# Altium PCB PCB1.PcbDoc (part 3 of 4)
Units mil, origin at the board's own origin, x right, y up, seen from the top; angles counter-clockwise.
Board outline 5315 x 3730 mil, 2 copper layers (Top Layer, Bottom Layer); 713 components, 554 nets, 2458 pads, 0 vias.
Unrouted connection lines stored in the file: 1728.
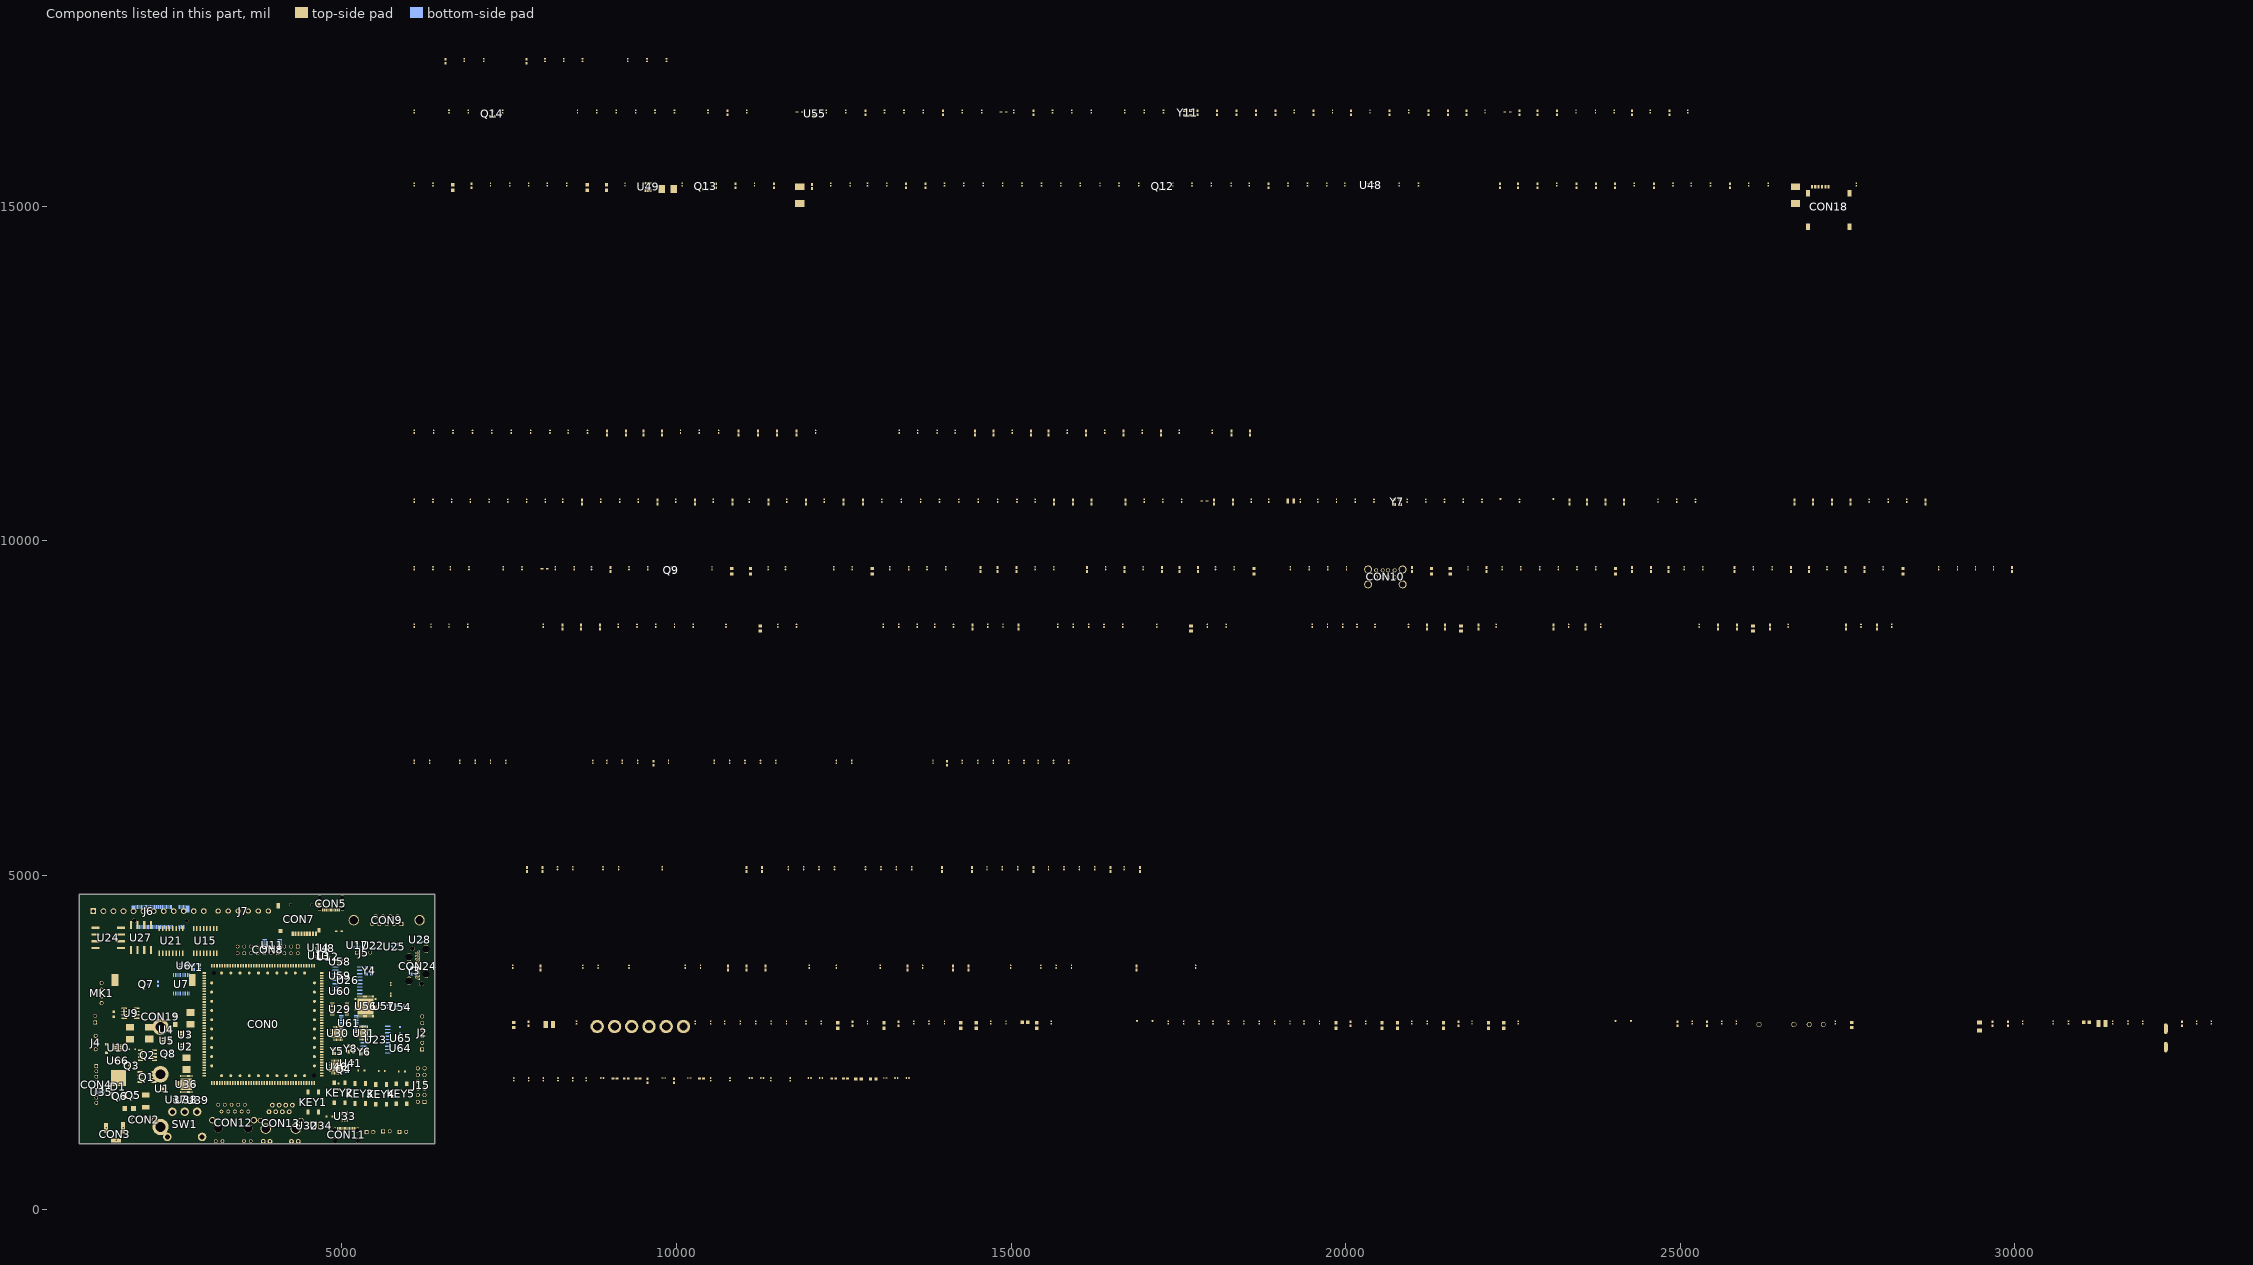
[diagram p2: the components of this part, seen from the top]

## Part data (continued)
R30 R34 R35 R41 R78 R79 R80 R81 R82 R83 R99 R111 R139 R140 R141 R142 R145 R152 R154 R155 R156 R159 R193 R313 R316: library part Resistor_Dup3, "贴片电阻,10K,±1%,1/16W", Manufacturer Character=中国大陆, Operation Temperature（℃）=-55~155℃, Temperature=–55~155℃, CLASS=DISCRETE, PCB Footprint=R0402
  R30 R34 R35 R41 R193 R313 R316: As-Welded=/
  R78 R79 R80 R81 R82 R83: As-Welded=DNP
  R99 R111: As-Welded=/, room=6
  R139 R140 R141 R142 R145 R152 R154 R155 R156 R159: As-Welded=/, room="USB HUB"
R32 R37 R39 R77 R86 R87 R88 R89 R90 R91 R92 R93 R94 R194 R279 R281 R284 R287 R288 R296 R307 R310 R311 R312 R392 R446: library part Resistor_Dup3, "贴片电阻,10K,±1%,1/16W", Manufacturer Character=中国大陆, Operation Temperature（℃）=-55~155℃, CLASS=DISCRETE, PCB Footprint=R0402
  R32 R37 R39 R446: As-Welded=/, Temperature=-55~155℃
  R77 R86 R87 R88 R89 R90 R91 R92 R93 R94: As-Welded=/, room=485-5, Temperature=-55~155℃
  R194 R392: As-Welded=/
  R279 R284 R287 R288 R296 R307 R310 R311 R312: As-Welded=/, room="USB HUB"
  R281: As-Welded=DNP, Temperature=-55~155℃
R33: library part Resistor_Dup3, "贴片电阻,68K,±1%,1/16W", Manufacturer Character=中国大陆, Operation Temperature（℃）=-55~155℃, As-Welded=/, CLASS=DISCRETE, PCB Footprint=R0402, Temperature=-55~155℃
R42: library part Resistor_Dup3, "28K,±1%,R0402,≥1/16W", Manufacturer Character=中国大陆, Operation Temperature（℃）=-40~85℃, Temperature=-55~155℃, As-Welded=/, CLASS=DISCRETE, PCB Footprint=R0402
R45 R138 R153 R393: library part Resistor_Dup3, "贴片电阻,1M,±1%,1/10W", Manufacturer Character=中国大陆, Operation Temperature（℃）=-55~155℃, As-Welded=/, CLASS=DISCRETE, PCB Footprint=R0603
  R45 R138 R153: room="USB HUB"
R46 R48 R55 R61: library part Resistor_Dup2, "贴片电阻,100R,±1%,1/10W", Manufacturer Character=中国大陆, Operation Temperature（℃）=-55~155℃, As-Welded=/, CLASS=DISCRETE, PCB Footprint=R0603, Temperature=-55~155℃
  R46 R48: room=JTAG
R47 R49 R50 R52 R72 R84 R100 R106 R112 R116 R163: library part Resistor_Dup3, "贴片电阻,1K,±1%,1/16W", Manufacturer Character=中国大陆, Operation Temperature（℃）=-55~155℃, As-Welded=/, CLASS=DISCRETE, PCB Footprint=R0402
  R72: room=EEPROM/RTC
  R84: room=JTAG_DSP
  R100 R106 R112 R116: room=6
R54: library part Resistor_Dup2, "贴片电阻,22R,±1%,1/16W", Manufacturer Character=中国大陆, Operation Temperature（℃）=-55~155℃, As-Welded=/, CLASS=DISCRETE, PCB Footprint=R0402, room=JTAG, Temperature=-55~155℃
R57: library part Resistor_Dup2, "贴片电阻,10K,±1%,1/16W", Manufacturer Character=中国大陆, Operation Temperature（℃）=-55~155℃, Temperature=-55~125℃, As-Welded=/, CLASS=DISCRETE, PCB Footprint=R0402, room=KEY
R64 R65: library part Resistor_Dup3, "贴片电阻,5.1K,±1%,1/16W", Manufacturer Character=中国大陆, Operation Temperature（℃）=-55~155℃, Temperature=-55~125℃, As-Welded=/, CLASS=DISCRETE, PCB Footprint=R0402, room=JTAG
R95: library part Resistor_Dup3, "贴片电阻,4.7K,±1%,1/16W", Manufacturer Character=中国大陆, Mfr_name=PANASONIC-ECG, Mfr_part_number=ERJ-2RNF6981V, Mistral Part No=110009031036-R, Operation Temperature（℃）=-55~155℃, Package=0402, Tolerance=1%, As-Welded=/, Chkd/date=SHREESHAIL/100807, CLASS=DISCRETE, Crtd /date=MAZHAR/090807, Custom_Duty=15%, Customs_HS_Code=85332119, Datasheet=Y:\MIS_DATABASE\DATASHEETS\RESISTORS\PAN_ERJ.PDF, Distributor_name=NA, Distributor_part_number=NA, Height=0.40MM, Part_type=RESISTORS\FIXED, PCB Footprint=R0402, Project="TELEMETRY ENCODER", Wattage=1/16W
R96: library part Resistor_Dup3, "贴片电阻,1K,±1%,1/16W", Manufacturer Character=中国大陆, Mfr_name=PANASONIC-ECG, Mfr_part_number=ERJ-2RNF6981V, Mistral Part No=110009031036-R, Operation Temperature（℃）=-55~155℃, Package=0402, Tolerance=1%, As-Welded=/, Chkd/date=SHREESHAIL/100807, CLASS=DISCRETE, Crtd /date=MAZHAR/090807, Custom_Duty=15%, Customs_HS_Code=85332119, Datasheet=Y:\MIS_DATABASE\DATASHEETS\RESISTORS\PAN_ERJ.PDF, Distributor_name=NA, Distributor_part_number=NA, Height=0.40MM, Part_type=RESISTORS\FIXED, PCB Footprint=R0402, Project="TELEMETRY ENCODER", Wattage=1/16W
R97: library part Resistor_Dup3, "贴片电阻,10K,±1%,1/16W", Manufacturer Character=中国大陆, Mfr_name=PANASONIC-ECG, Mfr_part_number=ERJ-2RNF6981V, Mistral Part No=110009031036-R, Operation Temperature（℃）=-55~155℃, Package=0402, Tolerance=1%, As-Welded=/, Chkd/date=SHREESHAIL/100807, CLASS=DISCRETE, Crtd /date=MAZHAR/090807, Custom_Duty=15%, Customs_HS_Code=85332119, Datasheet=Y:\MIS_DATABASE\DATASHEETS\RESISTORS\PAN_ERJ.PDF, Distributor_name=NA, Distributor_part_number=NA, Height=0.40MM, Part_type=RESISTORS\FIXED, PCB Footprint=R0402, Project="TELEMETRY ENCODER", Wattage=1/16W
R98: library part Resistor_Dup3, "贴片电阻,20K,±1%,1/16W", Manufacturer Character=中国大陆, Mfr_name=PANASONIC-ECG, Mfr_part_number=ERJ-2RNF6981V, Mistral Part No=110009031036-R, Operation Temperature（℃）=-55~155℃, Package=0402, Tolerance=1%, As-Welded=/, Chkd/date=SHREESHAIL/100807, CLASS=DISCRETE, Crtd /date=MAZHAR/090807, Custom_Duty=15%, Customs_HS_Code=85332119, Datasheet=Y:\MIS_DATABASE\DATASHEETS\RESISTORS\PAN_ERJ.PDF, Distributor_name=NA, Distributor_part_number=NA, Height=0.40MM, Part_type=RESISTORS\FIXED, PCB Footprint=R0402, Project="TELEMETRY ENCODER", Wattage=1/16W
R101 R113: library part Resistor_Dup3, "贴片电阻,120R,±1%,1/8W", Manufacturer Character=中国大陆, Operation Temperature（℃）=-55~155℃, Temperature=-55~125℃, As-Welded=/, CLASS=DISCRETE, PCB Footprint=R0805, room=6
R102 R104 R114 R115: library part Resistor_Dup3, "贴片电阻,10R,±1%,1/10W", Manufacturer Character=中国大陆, Operation Temperature（℃）=-55~155℃, Temperature=–55~155℃, As-Welded=/, CLASS=DISCRETE, PCB Footprint=R0603, room=6
R117 R118 R125 R126 R161 R162: library part "R 1%", "贴片电阻,10K,±1%,1/16W", Manufacturer Character=中国大陆, Operation Temperature（℃）=-55~155℃, Temperature=–55~155℃, As-Welded=/, Characteristic="0402 1/16W +/-1%", CLASS=DISCRETE, PCB Footprint=R0402
  R161 R162: room=DRDUSB
R119 R120 R123 R124 R127 R128 R131 R132: library part "R 1%", "贴片电阻,22R,±1%,1/16W", Manufacturer Character=中国大陆, Operation Temperature（℃）=-55~155℃, As-Welded=/, Characteristic="0402 1/16W +/-1%", CLASS=DISCRETE, PCB Footprint=R0402, Temperature=-55~155℃
R121 R129: library part "R 1%", "贴片电阻,120R,±1%,1/8W", Manufacturer Character=中国大陆, Operation Temperature（℃）=-55~155℃, Temperature=-55~125℃, As-Welded=/, Characteristic="0402 1/16W +/-1%", CLASS=DISCRETE, PCB Footprint=R0805
R122 R130: library part "R 1%", "贴片电阻,33R,±1%,1/16W", Manufacturer Character=中国大陆, Operation Temperature（℃）=-55~155℃, As-Welded=/, Characteristic="0402 1/16W +/-1%", CLASS=DISCRETE, PCB Footprint=R0402, Temperature=-55~155℃
R136 R150 R295: library part Resistor_Dup3, "贴片电阻,0R,±1%,1/10W", Manufacturer Character=中国大陆, Operation Temperature（℃）=-55~155℃, CLASS=DISCRETE, PCB Footprint=R0603
  R136 R150: As-Welded=DNP
  R295: As-Welded=/
R137 R151: library part Resistor_Dup3, "0R,±1%,R0603,≥1/10W", Manufacturer Character=中国大陆, Operation Temperature（℃）=-55~155℃, Temperature=–55~155℃, As-Welded=/, CLASS=DISCRETE, PCB Footprint=R0603
R143 R157: library part Resistor_Dup3, "贴片电阻,680R,±1%,1/10W", Manufacturer Character=中国大陆, Operation Temperature（℃）=-55~155℃, As-Welded=DNP, CLASS=DISCRETE, PCB Footprint=R0603, room="USB HUB", Temperature=-55~155℃
R164: library part "R 1%", "贴片电阻,51K,±1%,1/16W", Manufacturer Character=中国大陆, Mfr_name=PANASONIC-ECG, Mfr_part_number=ERJ-2RNF6981V, Mistral Part No=110009031036-R, Operation Temperature（℃）=-55~155℃, Package=0402, Tolerance=1%, As-Welded=/, Characteristic="0402 1/16W +/-1%", CLASS=DISCRETE, Crtd /date=MAZHAR/090807, Custom_Duty=15%, Customs_HS_Code=85332119, Datasheet=Y:\MIS_DATABASE\DATASHEETS\RESISTORS\PAN_ERJ.PDF, Distributor_name=NA, Distributor_part_number=NA, Height=0.40MM, Part_type=RESISTORS\FIXED, PCB Footprint=R0402, Project="TELEMETRY ENCODER", Temperature=-55~155℃
R166: library part "R 1%", "贴片电阻,100K,±1%,1/16W", Manufacturer Character=中国大陆, Operation Temperature（℃）=-55~155℃, As-Welded=/, Characteristic="0402 1/16W +/-1%", CLASS=DISCRETE, PCB Footprint=R0402, room="USB HUB", Temperature=-55~155℃
R167: library part "R 1%", "贴片电阻,15K,±1%,1/16W", Manufacturer Character=中国大陆, Operation Temperature（℃）=-55~155℃, Temperature=-55~125℃, As-Welded=DNP, Characteristic="0402 1/16W +/-1%", CLASS=DISCRETE, PCB Footprint=R0402, room=DRDUSB
R168: library part 10_R_0, "0R,±1%,R0402,≥1/16W", Manufacturer Character=中国大陆, Operation Temperature（℃）=-55~155℃, As-Welded=/, CLASS=DISCRETE, PCB Footprint=R0402, room=ecat1, Temperature=-55~155℃
R169: library part "R 1%", "贴片电阻,100K,±1%,1/16W", Manufacturer Character=中国大陆, Operation Temperature（℃）=-55~155℃, Temperature=-55~125℃, As-Welded=/, Characteristic="0402 1/16W +/-1%", CLASS=DISCRETE, PCB Footprint=R0402, room=DRDUSB
R170 R172: library part "R 1%", "0R,±1%,R0402,≥1/16W", Manufacturer Character=中国大陆, Operation Temperature（℃）=-55~155℃, Temperature=-55~125℃, As-Welded=/, Characteristic="0402 1/16W +/-1%", CLASS=DISCRETE, PCB Footprint=R0402, room="USB HUB"
R171: library part "R 1%", "贴片电阻,10K,±1%,1/16W", Manufacturer Character=中国大陆, Operation Temperature（℃）=-55~155℃, Temperature=-55~125℃, As-Welded=/, Characteristic="0402 1/16W +/-1%", CLASS=DISCRETE, PCB Footprint=R0402, room="USB HUB"
R174 R285 R291 R292 R293 R294 R297 R298 R302 R303 R304 R305 R306 R444: library part Resistor_Dup3, "贴片电阻,0R,±1%,1/16W", Manufacturer Character=中国大陆, Operation Temperature（℃）=-55~155℃, CLASS=DISCRETE, PCB Footprint=R0402
  R174 R293: As-Welded=DNP
  R285 R291 R292 R294 R304 R306 R444: As-Welded=/
  R297 R298 R302 R303 R305: As-Welded=/, room="USB HUB"
R175 R176 R177 R178 R181 R182 R183 R184: library part Resistor_Dup3, "37.4R,±1%,R0603,≥1/10W", Manufacturer Character=中国大陆, Operation Temperature（℃）=-40~85℃, As-Welded=DNP, CLASS=DISCRETE, PCB Footprint=R0603
R180 R186: library part Resistor_Dup3, "贴片电阻,330R,±1%,1/16W", Manufacturer Character=中国大陆, Operation Temperature（℃）=-55~155℃, As-Welded=/, CLASS=DISCRETE, PCB Footprint=R0402
R192: library part Resistor_Dup3, "贴片电阻,2.49K,±1%,1/10W", Manufacturer Character=中国大陆, Operation Temperature（℃）=-55~155℃, As-Welded=/, CLASS=DISCRETE, PCB Footprint=R0603
R195 R196 R197 R204 R208 R209: library part Resistor_Dup3, "0R,±1%,R0603,≥1/10W", Manufacturer Character=中国大陆, Operation Temperature（℃）=-55~155℃, As-Welded=/, CLASS=DISCRETE, PCB Footprint=R0603, room=RS232
R219: library part R_1, "贴片电阻,2.49K,±1%,1/10W", Manufacturer Character=中国大陆, Operation Temperature（℃）=-55~155℃, As-Welded=/, PCB Footprint=R0603, room="USB HUB"

## Text inside footprints (layer, text, board x,y; h text height)
C262: Top Overlay "+" at 11740,15335 h40 r90
CON0: Top Overlay "160" at 2836.1,1992.28 h25; Top Overlay "1" at 3051.1,1827.28 h25; Top Overlay "40" at 4566.1,1822.28 h25; Top Overlay "41" at 4746.1,1992.28 h25; Top Overlay "80" at 4746.1,3527.28 h25; Top Overlay "81" at 4576.1,3692.28 h25; Top Overlay "120" at 3016.1,3697.28 h25; Top Overlay "121" at 2836.1,3527.28 h25; Top Overlay "-" at 2886.1,2387.28 h25; Top Overlay "-" at 2881.1,2782.28 h25; Top Overlay "-" at 2886.1,3172.28 h25; Top Overlay "-" at 3421.1,1842.28 h25 r90; Top Overlay "-" at 3811.1,1842.28 h25 r90; Top Overlay "-" at 4206.1,1842.28 h25 r90; Top Overlay "-" at 4736.1,2347.28 h25; Top Overlay "-" at 4736.1,2737.28 h25; Top Overlay "-" at 4736.1,3132.28 h25; Top Overlay "-" at 4246.1,3687.28 h25 r90; Top Overlay "-" at 3851.1,3687.28 h25 r90; Top Overlay "-" at 3461.1,3687.28 h25 r90
CON2: Top Overlay "1" at 2185,1445 h40
CON4: Top Overlay "8" at 1431.1,1585.7 h25 r90
CON5: Top Overlay "1" at 5015,4415 h40 r180
CON7: Top Overlay "1" at 4275,4050 h40 r180
CON11: Top Overlay "1" at 4886.35,1281.8 h40
CON18: Top Overlay "1" at 26895,15325 h40
CON19: Bottom Overlay "1" at 2647.8,4640.4 h40 r180
D1: Top Overlay "3" at 1783.5,1724.5 h25; Top Overlay "2" at 1644.21,2105.3 h25
D8: Top Overlay "+" at 1495.5,2285 h40 r90
J2: Top Overlay "1" at 6393,2384.4 h40 r90
J6: Top Overlay "1" at 1280,4354.9 h40 r180
J7: Top Overlay "1" at 3904.9,4375 h40 r180
J15: Top Overlay "2" at 6070.8,1604.4 h25 r90; Top Overlay "12" at 6071.6,2089.79 h25 r90; Top Overlay "11" at 6328.7,2089.79 h25 r90
KEY1: Top Overlay "4" at 4715.8,1750.7 h25 r90; Top Overlay "3" at 4713.3,1440.71 h25 r90; Top Overlay "2" at 4452.01,1753.8 h25 r90; Top Overlay "1" at 4455.3,1443.4 h25 r90
KEY2: Top Overlay "4" at 5109.1,1889.5 h25 r90; Top Overlay "3" at 5106.6,1579.51 h25 r90; Top Overlay "2" at 4845.31,1892.6 h25 r90; Top Overlay "1" at 4848.6,1582.2 h25 r90
KEY3: Top Overlay "4" at 5418.2,1877.9 h25 r90; Top Overlay "3" at 5415.7,1567.91 h25 r90; Top Overlay "2" at 5154.41,1881 h25 r90; Top Overlay "1" at 5157.7,1570.6 h25 r90
KEY4: Top Overlay "4" at 5729.1,1864.5 h25 r90; Top Overlay "3" at 5726.6,1554.51 h25 r90; Top Overlay "2" at 5465.31,1867.6 h25 r90; Top Overlay "1" at 5468.6,1557.2 h25 r90
KEY5: Top Overlay "4" at 6034.1,1874.5 h25 r90; Top Overlay "3" at 6031.6,1564.51 h25 r90; Top Overlay "2" at 5770.31,1877.6 h25 r90; Top Overlay "1" at 5773.6,1567.2 h25 r90
LED4: Top Overlay "+" at 12040,15185 h50 r90
MK1: Top Overlay "1" at 1510,3080 h40 r90
Q1: Top Overlay "1" at 2315,1905 h40 r90
Q2: Top Overlay "1" at 2325,2230 h40 r90
Q3: Top Overlay "1" at 1975,2135 h40 r180
Q4: Bottom Overlay "1" at 5145,2117.5 h40
Q5: Bottom Overlay "2" at 1940,1762.5 h25 r180; Bottom Overlay "3" at 1830,1667.5 h25 r180
Q6: Bottom Overlay "2" at 1737.4,1743.1 h25 r180; Bottom Overlay "3" at 1627.4,1648.1 h25 r180
Q7: Bottom Overlay "1" at 1955,3350 h40 r180
Q8: Bottom Overlay "2" at 2453.1,2272.6 h25 r90; Bottom Overlay "3" at 2358.1,2382.6 h25 r90
Q9: Top Overlay "3" at 9870,9607.5 h25; Top Overlay "2" at 9980,9512.5 h25
Q12: Top Overlay "3" at 17215,15342.5 h25; Top Overlay "2" at 17325,15247.5 h25
Q13: Top Overlay "3" at 10385,15342.5 h25; Top Overlay "2" at 10495,15247.5 h25
Q14: Top Overlay "3" at 7200,16432.5 h25; Top Overlay "2" at 7310,16337.5 h25
SW1: Top Overlay "1" at 2450,1620.2 h40
U6: Bottom Overlay "1" at 2525,3620 h40 r90
U7: Bottom Overlay "1" at 2500,3610 h40 r90
U8: Top Overlay "1" at 4768.9,3792.7 h40 r90
U9: Top Overlay "1" at 1640,3000 h40
U10: Top Overlay "1" at 1795,2400 h40 r180
U11: Bottom Overlay "1" at 3738,3877.8 h40 r180
U12: Top Overlay "1" at 4900,3775 h40 r180
U13: Top Overlay "1" at 4767.3,3783.3 h40 r180
U14: Top Overlay "1" at 4530,3925 h40
U15: Top Overlay "1" at 2795,3720 h40 r90
U17: Bottom Overlay "1" at 5245,3835 h40 r270
U21: Top Overlay "1" at 2285,3720 h40 r90
U22: Bottom Overlay "1" at 5480,3830 h40 r270
U23: Bottom Overlay "1" at 5798.9,2730.01 h40
U24: Top Overlay "4" at 1798.5,4208.73 h25 r90; Top Overlay "8" at 1233.5,3868.73 h25 r90; Top Overlay "5" at 1238.5,4208.73 h25 r90; Top Overlay "1" at 1841,3930 h40 r180
U25: Bottom Overlay "1" at 5900,3952.5 h40
U26: Bottom Overlay "1" at 5380,3615 h40
U27: Top Overlay "4" at 2138.73,3777.5 h25; Top Overlay "8" at 1798.73,4342.5 h25; Top Overlay "5" at 2138.73,4337.5 h25; Top Overlay "1" at 1860,3735 h40 r90
U28: Bottom Overlay "1" at 6185,3920 h40 r270
U29: Top Overlay "1" at 4750,3075 h40
U32: Top Overlay "1" at 4465,1145 h40 r90
U33: Top Overlay "5" at 4996.6,1477.21 h25; Top Overlay "4" at 5067.4,1477.21 h25; Top Overlay "3" at 5107.44,1293.98 h25
U34: Top Overlay "1" at 4572.7,1265.5 h40
U40: Top Overlay "32" at 4807.35,2014.12 h25 r90
U48: Top Overlay "1" at 20260,15325 h40
U54: Bottom Overlay "1" at 5980,3055 h40 r270
U55: Top Overlay "F" at 12108.4,16294.1 h25; Top Overlay "A" at 12029.3,16294.5 h25; Top Overlay "6" at 12004.5,16455 h25 r270; Top Overlay "1" at 11989.5,16350 h25 r270
U56: Top Overlay "32" at 5206.4,3217.01 h25; Top Overlay "17" at 5480.5,3203.11 h25; Top Overlay "16" at 5508.4,3168.11 h25; Top Overlay "48" at 5191.4,2871.01 h25 r90; Top Overlay "33" at 5198.4,3168.01 h25 r90; Top Overlay "64" at 5486.9,2854.01 h25; Top Overlay "49" at 5187.9,2852.01 h25
U57: Bottom Overlay "1" at 5735,3070 h40 r270
U61: Bottom Overlay "1" at 5317,2914.6 h40
U64: Top Overlay "1" at 5860,2300 h40 r90
U65: Top Overlay "1" at 5868.3,2447.7 h40 r90